# Altium PCB RF-UNIT.PcbDoc (part 2 of 3)
Units mm, origin at the board's own origin, x right, y up, seen from the top; angles counter-clockwise.
Board outline 187 x 77 mm, 2 copper layers (Top Layer, Top, Bottom Layer, Bottom); 286 components, 158 nets, 740 pads, 1203 vias.
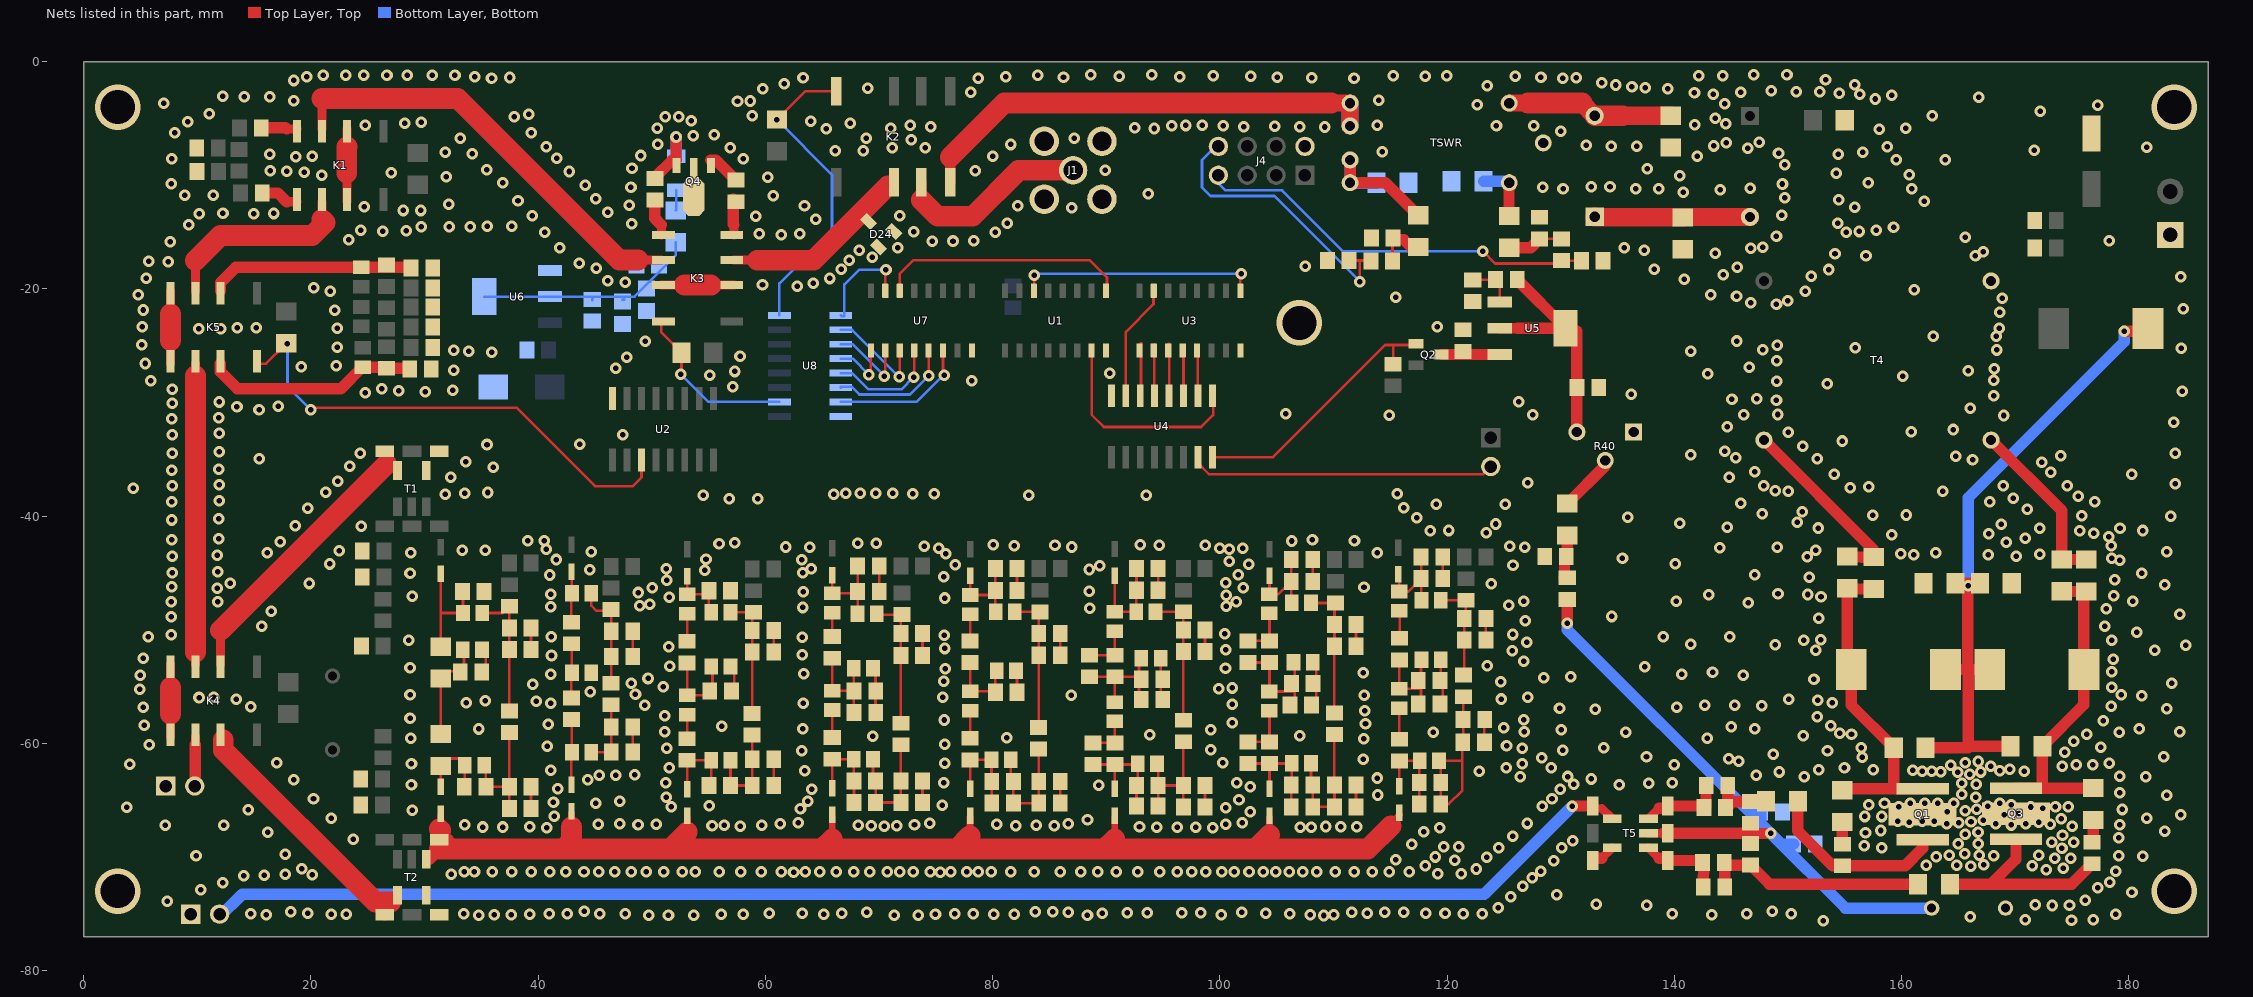
[diagram p2: the nets of this part, all layers, seen from the top]

## Via types
v1: diameter 1.016, hole 0.486, Top Layer, Top to Bottom Layer, Bottom, tented both sides, 1198 vias
v2: diameter 4, hole 3, Top Layer, Top to Bottom Layer, Bottom, 5 vias

## Nets (pads, with @x,y where several pads share a name; then routed paths per layer and width w, separated by ;. In a path a pad name is that pad's centre, name@x,y a point inside that pad or via, vN(x,y) a via of type N, cw(c..) or ccw(c..) an arc to the next point about the centre after c; other vN are vias at no path point) (continued)
GND: C1.1 C2.1 C3.1 C4.1 C7.1 C8.1 C9.1 C10.1 C13.1 C14.1 C16.1 C17.1 C18.1 C19.1 C22.1 C23.1 C25.1 C26.1 C28.1 C29.1 C30.1 C31.1 C34.1 C35.1 C37.1 C40.1 C41.1 C42.1 C43.1 C46.1 C47.1 C49.1 C50.1 C54.1 C55.1 C56.1 C57.1 C60.1 C61.1 C63.1 C64.1 C68.1 C69.1 C70.1 C71.1 C74.1 C75.1 C77.1 C78.1 C82.1 C83.1 C84.1 C85.1 C88.1 C89.1 C95.2 C96.1 C97.1 C98.1 C99.1 C100.1 C104.1 C105.2 C106.1 C107.1 C108.1 C109.1 C110.1 C113.2 C114.2 C115.1 C116.2 C117.1 C118.1 C119.2 C121.1 C122.1 C123.1 C124.1 C125.1 C126.1 C127.1 C128.2 C129.2 C130.1 C133.1 D24.1 D24.2 J1.1 J1.2 J1.3 J1.4 J2.1 J4.2 J8.1 J9.1 L2.1 L5.1 L10.1 L15.1 L20.1 L25.1 L30.1 L35.1 Q1.2 Q3.2 Q4.0 Q4.2 R30.1 R31.1 R36.2 R40.1 R45.1 R51.2 R53.1 R54.1 R55.2 R56.2 T1.4 T1.11 T2.6 T2.10 T4.4 T5.6 T5.10 TSWR.7 U1.8 U2.8 U3.8 U4.8 U6.1 U7.8 U8.8 | length 65.2
  Top Layer, Top w0.23: L35.1@35.065,-51.753 35.377,-52.065 C89.1@35.377,-53.657 ; C85.1@39.37,-65.722 C84.1@39.37,-63.817 ; C83.1@39.37,-51.753 C82.1@39.37,-49.848 ; C3.1@48.327,-60.767 C4.1@48.327,-58.544 ; C2.1@48.327,-52.353 C1.1@48.327,-50.131 ; L5.1@56.933,-53.234 57.245,-53.546 C14.1@57.245,-55.139 ; C9.1@60.742,-63.711 C10.1@60.742,-61.396 ; C8.1@60.742,-51.964 C7.1@60.742,-50.059 ; L10.1@69.473,-53.406 69.693,-53.626 C26.1@69.693,-57.216 ; C22.1@70.015,-46.631 C25.1@70.015,-44.408 ; C18.1@73.825,-65.205 C19.1@73.825,-63.3 ; C17.1@73.825,-52.254 C16.1@73.825,-50.349 ; L15.1@82.056,-53.596 82.144,-53.684 C35.1@82.144,-55.501 ; C34.1@82.149,-46.53 C37.1@82.149,-44.625 ; C30.1@85.959,-65.263 C31.1@85.959,-63.358 ; C29.1@85.959,-52.245 C28.1@85.959,-50.34 ; C46.1@94.564,-46.525 C49.1@94.564,-44.62 ; C50.1@94.784,-56.327 94.784,-52.522 L20.1@94.789,-52.517 ; C42.1@98.691,-65.616 C43.1@98.691,-63.711 ; C41.1@98.691,-51.923 C40.1@98.691,-50.018 ; L25.1@108.177,-52.88 108.49,-53.193 108.49,-54.785 C64.1@108.49,-56.69 ; C60.1@108.177,-45.736 C63.1@108.177,-43.831 ; C56.1@111.987,-65.58 C57.1@111.987,-63.675 ; C55.1@111.987,-51.451 C54.1@111.987,-49.546 ; L30.1@119.45,-52.651 119.45,-54.402 119.604,-54.556 C78.1@119.604,-56.461 ; C74.1@119.609,-45.507 C77.1@119.609,-43.602 ; C70.1@123.283,-59.901 123.283,-57.906 C71.1@123.305,-57.906 ; C69.1@123.419,-50.905 C68.1@123.419,-49
  Top Layer, Top w0.76: 133.6,-70.122 T5.10@134.537,-69.185
  Top Layer, Top w1: T5.6@132.826,-70.315 133.02,-70.122 133.6,-70.122
  other v1: 153.12,-75.621 174.955,-75.554 170.892,-75.538 176.856,-75.504 166.035,-75.263 109.124,-75.15 34.794,-75.134 49.718,-75.11 51.473,-75.11 53.707,-75.11 71.342,-75.11 73.456,-75.11 88.35,-75.113 36.15,-75.091 16.084,-75.07 37.627,-75.072 100.131,-75.066 107.967,-75.07 110.031,-75.075 143.299,-75.081 178.853,-75.038 21.79,-75.03 23.106,-75.03 39.265,-75.03 56.101,-75.03 58.056,-75.03 65.158,-75.03 74.972,-75.03 80.119,-75.03 81.914,-75.03 150.278,-75.015 14.719,-74.998 33.443,-74.996 40.98,-74.991 42.576,-74.991 45.409,-74.991 47.683,-74.991 76.648,-74.991 78.284,-74.991 106.132,-74.991 121.413,-74.991 123.082,-74.99 139.828,-74.987 146.366,-74.976 19.715,-74.951 60.33,-74.951 63.243,-74.951 66.714,-74.951 89.654,-74.951 104.057,-74.951 112.954,-74.951 118.141,-74.951 119.817,-74.951 91.849,-74.911 93.604,-74.911 96.636,-74.911 98.312,-74.911 68.908,-74.871 86.662,-74.871 101.943,-74.871 111.598,-74.871 114.51,-74.871 116.186,-74.871 18.239,-74.831 83.75,-74.831 85.306,-74.831 44.052,-74.791 148.605,-74.759 124.51,-74.481 137.582,-74.266 173.255,-74.27 174.779,-74.233 171.768,-74.197 133.121,-74.163 7.366,-73.914 176.157,-73.798 125.614,-73.48 129.648,-73.315 180.279,-73.096 10.287,-72.898 177.281,-72.71 126.639,-72.557 12.254,-72.278 178.333,-72.239 127.477,-71.839 14.09,-71.639 15.885,-71.599 20.114,-71.559 17.76,-71.519 32.342,-71.527 119.164,-71.486 121.244,-71.478 62.477,-71.363 75.411,-71.352 33.498,-71.3 34.399,-71.3 35.953,-71.3 37.687,-71.3 39.398,-71.3 41.042,-71.3 42.438,-71.3 44.037,-71.3 45.343,-71.3 46.762,-71.3 48.181,-71.3 49.532,-71.3 51.041,-71.3 52.685,-71.3 53.811,-71.3 55.928,-71.3 57.842,-71.3 59.644,-71.3 61.378,-71.3 63.495,-71.3 64.778,-71.3 66.22,-71.3 67.773,-71.3 69.192,-71.3 70.724,-71.3 71.827,-71.3 72.998,-71.3 74.507,-71.3 76.331,-71.3 77.727,-71.3 78.741,-71.3 79.867,-71.3 81.578,-71.3 83.65,-71.3 85.947,-71.3 87.749,-71.3 89.257,-71.3 90.901,-71.3 92.771,-71.3 94.73,-71.3 96.261,-71.3 97.522,-71.3 98.761,-71.3 100.157,-71.3 101.261,-71.3 102.567,-71.3 103.805,-71.3 104.909,-71.3 106.103,-71.3 107.296,-71.3 108.512,-71.3 110.156,-71.3 111.823,-71.3 113.399,-71.3 114.908,-71.3 116.687,-71.3 178.841,-71.259 128.235,-71.24 172.72,-71.12 19.178,-71.05 122.576,-71.057 174.244,-70.993 166.074,-70.824 118.061,-70.787 171.514,-70.751 162.179,-70.739 164.846,-70.739 167.235,-70.679 129.392,-70.323 120.671,-70.283 115.494,-70.245 173.482,-70.104 174.879,-70.104 118.961,-69.999 123.487,-70.003 163.068,-69.977 181.242,-69.916 168.105,-69.881 179.095,-69.881 9.89,-69.873 164.211,-69.85 166.836,-69.845 172.085,-69.85 17.742,-69.74 165.566,-69.7 124.564,-69.205 130.11,-69.205 158.239,-69.192 174.117,-69.215 119.705,-69.098 121.011,-69.098 156.716,-69.011 116.888,-68.885 164.973,-68.834 166.751,-68.834 173.228,-68.707 175.133,-68.707 131.068,-68.567 23.725,-68.43 179.131,-68.321 125.761,-68.168 174.162,-68.067 165.602,-67.995 156.825,-67.886 16.213,-67.811 117.945,-67.797 166.727,-67.814 183.147,-67.73 158.167,-67.669 40.767,-67.437 99.358,-67.423 119.344,-67.432 94.453,-67.396 97.887,-67.396 96.264,-67.381 107.083,-67.381 108.054,-67.378 35.127,-67.362 36.871,-67.362 92.927,-67.341 110.656,-67.351 112.042,-67.342 39.274,-67.325 109.327,-67.317 57.787,-67.301 70.482,-67.288 175.006,-67.31 85.415,-67.265 55.305,-67.236 82.036,-67.237 56.397,-67.219 59.694,-67.219 69.31,-67.234 71.572,-67.234 7.198,-67.196 12.34,-67.207 68.165,-67.207 83.835,-67.21 73.125,-67.179 169.672,-67.183 179.204,-67.161 33.546,-67.158 48.791,-67.159 45.274,-67.13 50.412,-67.128 100.5,-67.119 173.074,-67.124 80.347,-67.101 47.204,-67.079 86.669,-67.074 61.329,-67.055 74.487,-67.043 127.038,-67.051 163.957,-67.056 168.275,-67.056 170.942,-67.056 62.888,-66.993 101.968,-66.978 165.022,-66.979 160.67,-66.943 166.11,-66.907 172.085,-66.929 162.882,-66.871 159.654,-66.834 161.83,-66.834 167.198,-66.762 88.352,-66.707 174.053,-66.653 21.786,-66.596 181.568,-66.589 156.752,-66.435 158.239,-66.435 41.402,-66.421 169.037,-66.294 184.552,-66.282 170.307,-66.167 102.683,-66.036 164.039,-66.015 28.918,-65.892 165.608,-65.913 14.472,-65.835 179.421,-65.819 166.624,-65.786 63.091,-65.753 172.421,-65.71 100.503,-65.666 3.786,-65.611 171.369,-65.601 51.736,-65.56 159.763,-65.565 173.546,-65.565 174.67,-65.565 128.355,-65.535 167.597,-65.528 55.062,-65.475 75.582,-65.457 157.099,-65.405 169.672,-65.405 45.078,-65.257 158.496,-65.278 160.782,-65.278 162.052,-65.278 163.195,-65.278 164.592,-65.278 168.656,-65.278 41.351,-65.174 47.179,-65.112 63.712,-65.087 101.686,-64.97 20.231,-64.86 129.232,-64.857 51.277,-64.754 166.545,-64.731 183.347,-64.578 113.879,-64.544 165.276,-64.477 179.204,-64.332 64.072,-64.036 129.95,-64.019 41.721,-63.983 102.655,-63.804 89.33,-63.69 28.853,-63.644 135.135,-63.642 166.582,-63.606 131.147,-63.58 137.747,-63.497 165.276,-63.497 101.482,-63.476 139.814,-63.461 51.222,-63.446 75.714,-63.448 18.48,-63.209 44.38,-63.207 132.669,-63.135 113.855,-63.05 151.42,-62.953 181.48,-62.946 126.438,-62.928 130.601,-62.917 179.204,-62.881 45.371,-62.825 46.834,-62.825 147.213,-62.808 48.501,-62.757 166.001,-62.699 164.949,-62.554 149.244,-62.518 166.981,-62.518 163.462,-62.482 122.816,-62.455 161.83,-62.446 162.664,-62.446 170.789,-62.446 63.472,-62.428 168.649,-62.409 160.996,-62.373 41.122,-62.348 152.726,-62.337 157.514,-62.337 169.52,-62.264 51.534,-62.166 125.206,-62.166 129.151,-62.155 154.975,-62.155 167.851,-62.01 174.126,-62.01 164.333,-61.938 139.995,-61.901 176.81,-61.901 175.359,-61.865 4.064,-61.849 28.853,-61.78 126.618,-61.779 75.768,-61.758 178.297,-61.756 17.002,-61.71 165.608,-61.722 100.274,-61.696 145.654,-61.575 166.751,-61.595 112.601,-61.379 144.783,-61.357 128.351,-61.273 137.549,-61.192 156.535,-61.212 183.068,-61.187 148.696,-60.971 174.38,-60.777 153.48,-60.664 63.2,-60.63 130.165,-60.598 99.216,-60.561 51.316,-60.449 126.596,-60.428 156.462,-60.378 133.791,-60.366 177.53,-60.357 40.822,-60.25 125.23,-60.205 5.773,-60.114 75.795,-60.069 175.141,-59.798 112.656,-59.608 142.893,-59.551 28.789,-59.532 81.228,-59.488 69.436,-59.382 107.044,-59.344 151.329,-59.348 93.84,-59.242 155.592,-59.217 176.302,-59.181 154.54,-59.109 179.149,-59.041 118.777,-59.018 126.799,-58.987 135.719,-59.003 184.464,-58.997 51.125,-58.977 99.186,-58.792 130.045,-58.795 34.787,-58.734 180.909,-58.733 147.062,-58.717 63.309,-58.695 125,-58.614 145.007,-58.554 56.164,-58.51 153.778,-58.456 5.334,-58.398 40.876,-58.315 112.819,-58.272 101.101,-58.178 177.753,-58.021 75.741,-57.944 126.731,-57.906 28.725,-57.797 152.568,-57.674 51.153,-57.56 112.755,-57.115 133.046,-57.008 183.347,-56.958 129.894,-56.928 5.255,-56.802 140.227,-56.809 14.719,-56.79 178.442,-56.715 147.687,-56.671 49.379,-56.654 142.693,-56.639 145.327,-56.639 101.101,-56.57 41.107,-56.473 63.336,-56.461 33.664,-56.423 153.887,-56.425 39.843,-56.278 35.358,-56.247 152.618,-56.207 13.424,-56.127 124.777,-56.096 150.056,-56.1 10.155,-55.964 11.463,-55.937 75.604,-55.954 127.089,-55.947 181.129,-55.793 86.936,-55.772 112.71,-55.766 28.725,-55.741 179.337,-55.714 48.569,-55.686 44.571,-55.461 4.935,-55.246 99.902,-55.183 101.074,-55.126 178.515,-55.046 51.032,-55.026 39.525,-54.786 48.186,-54.695 183.795,-54.708 75.705,-54.54 124.703,-54.561 152.291,-54.357 49.672,-54.29 128.506,-54.221 130.868,-54.142 4.975,-54.009 146.077,-54.009 140.651,-53.935 41.094,-53.901 63.363,-53.872 112.629,-53.804 143.36,-53.723 178.515,-53.704 75.85,-53.42 100.498,-53.39 28.725,-53.363 137.401,-53.242 51.589,-53.201 123.535,-53.179 126.731,-52.771 178.623,-52.58 5.259,-52.511 41.176,-52.266 63.227,-52.21 125.745,-51.861 152.436,-51.818 182.27,-51.799 100.535,-51.779 75.768,-51.649 51.48,-51.511 184.991,-51.36 148.878,-51.333 141.454,-51.272 127.024,-51.082 151.396,-50.944 28.596,-50.922 178.478,-50.912 152.871,-50.875 63.227,-50.657 41.149,-50.631 5.67,-50.606 139.023,-50.615 144.888,-50.615 75.741,-50.483 7.723,-50.425 125.772,-50.417 100.447,-50.346 180.68,-50.209 15.689,-49.709 177.898,-49.678 126.889,-49.213 152.69,-48.989 7.722,-48.871 134.508,-48.832 184.464,-48.639 16.509,-48.376 178.007,-48.155 88.567,-48.103 63.309,-48.041 41.122,-47.988 100.563,-47.933 48.929,-47.894 125.425,-47.85 49.844,-47.756 146.504,-47.628 7.699,-47.542 101.444,-47.527 11.802,-47.522 140.18,-47.503 126.738,-47.477 180.336,-47.477 75.768,-47.207 51.534,-47.151 152.908,-47.103 28.918,-47.067 178.66,-46.994 100.563,-46.952 143.035,-46.928 151.733,-46.898 41.094,-46.871 149.124,-46.818 48.816,-46.723 63.336,-46.651 88.513,-46.605 11.777,-46.338 50.061,-46.29 102.042,-46.284 112.686,-46.257 7.766,-46.235 183.15,-46.029 123.875,-45.966 19.858,-45.928 12.905,-45.913 100.536,-45.874 51.304,-45.625 178.768,-45.616 151.892,-45.398 75.686,-45.327 41.04,-45.181 101.605,-45.178 147.08,-45.163 181.129,-45.04 7.789,-44.996 28.725,-45.011 63.281,-44.989 11.814,-44.912 54.652,-44.764 44.527,-44.729 88.513,-44.697 51.277,-44.644 64.05,-44.64 89.436,-44.354 125.801,-44.31 76.728,-44.298 21.673,-44.212 102.555,-44.216 140.1,-44.191 100.836,-43.982 179.22,-43.882 63.2,-43.844 41.585,-43.819 54.774,-43.801 135.436,-43.709 178.478,-43.694 151.709,-43.581 170.1,-43.549 7.788,-43.532 11.753,-43.454 161.069,-43.403 167.633,-43.403 172.167,-43.367 75.877,-43.311 159.944,-43.295 16.148,-43.22 28.789,-43.211 113.871,-43.218 162.991,-43.222 44.691,-43.132 183.33,-43.137 22.496,-43.032 35.339,-43.011 152.436,-43.005 33.315,-42.99 40.698,-42.921 100.826,-42.921 102.006,-42.832 75.276,-42.808 100,-42.823 144,-42.802 63.918,-42.728 126.821,-42.75 149.069,-42.729 61.776,-42.716 86.973,-42.717 73.989,-42.667 125.519,-42.644 81.907,-42.619 178.442,-42.606 85.49,-42.578 98.731,-42.573 94.678,-42.553 80.045,-42.517 92.999,-42.512 55.921,-42.45 68.15,-42.397 69.768,-42.377 57.293,-42.348 169.229,-42.315 17.286,-42.268 40.557,-42.178 106.322,-42.189 39.083,-42.157 111.85,-42.148 108.153,-42.098 7.749,-42.083 11.904,-41.981 170.898,-41.953 178.224,-41.808 159.146,-41.626 167.67,-41.554 176.919,-41.517 123.438,-41.464 175.686,-41.3 118.509,-41.273 120.162,-41.264 181.216,-41.266 172.167,-41.082 179.223,-41.062 152.654,-41.046 144.662,-40.976 24.43,-40.906 18.605,-40.85 168.757,-40.695 124.266,-40.692 140.457,-40.625 150.804,-40.538 7.745,-40.34 11.9,-40.237 117.323,-40.141 135.891,-40.103 183.71,-40.011 175.867,-39.958 157.478,-39.922 160.412,-39.901 147.723,-39.802 151.239,-39.631 171.079,-39.414 19.708,-39.292 116.188,-39.266 119.054,-38.944 125.113,-38.962 145.86,-38.876 7.762,-38.739 167.779,-38.725 177.017,-38.727 11.917,-38.637 59.34,-38.482 56.816,-38.457 169.81,-38.434 175.54,-38.253 54.544,-38.157 83.186,-38.16 93.52,-38.157 66.021,-38.091 31.826,-38.059 74.862,-38.029 72.982,-38.017 115.594,-38.023 67.082,-37.98 68.366,-37.998 69.706,-37.998 71.214,-37.998 33.558,-37.971 21.302,-37.902 35.565,-37.921 150.029,-37.818 163.631,-37.814 148.882,-37.782 4.348,-37.529 155.483,-37.491 157.091,-37.43 7.779,-37.343 168.939,-37.346 174.597,-37.346 147.866,-37.31 11.934,-37.241 184.103,-37.147 127.09,-37.079 22.354,-36.95 32.306,-36.56 144.843,-36.564 154.068,-36.331 180.251,-36.306 173.11,-36.149 147.069,-36.093 7.755,-35.968 11.91,-35.865 36.05,-35.679 23.433,-35.601 172.349,-35.243 33.624,-35.211 166.243,-35.052 15.466,-34.964 152.581,-34.953 145.4,-34.844 164.768,-34.735 174.018,-34.668 141.448,-34.617 7.792,-34.449 24.332,-34.462 184.104,-34.449 11.947,-34.347 144.457,-34.3 151.312,-33.864 35.501,-33.697 43.682,-33.661 154.794,-33.389 7.788,-32.828 47.461,-32.82 11.943,-32.726 150.042,-32.631 160.838,-32.557 164.551,-32.377 144.655,-32.132 183.939,-31.727 7.743,-31.432 11.899,-31.33 168.976,-31.144 114.924,-31.136 127.557,-31.092 146.121,-31.081 149.096,-31.055 105.785,-31.002 15.435,-30.628 166.038,-30.491 13.496,-30.385 17.128,-30.326 7.781,-30.057 11.936,-29.955 126.294,-29.935 148.99,-29.802 145.073,-29.73 147.248,-29.659 168.105,-29.403 136.214,-29.26 24.802,-29.127 30.077,-29.037 184.719,-28.999 27.739,-28.977 32.495,-28.934 7.799,-28.853 26.241,-28.779 57.11,-28.619 153.448,-28.33 149.006,-28.125 5.906,-28.103 78.167,-28.09 168.105,-28.025 160.084,-27.679 55.096,-27.611 142.943,-27.485 90.297,-27.441 57.29,-27.27 165.848,-27.212 32.565,-27.178 168.141,-27.009 46.813,-26.983 146.602,-26.884 19.141,-26.836 22.249,-26.745 5.437,-26.567 149.027,-26.32 47.814,-26.026 57.769,-25.936 35.925,-25.567 33.902,-25.473 141.464,-25.478 32.565,-25.41 168.359,-25.377 147.798,-25.368 184.628,-25.214 155.913,-25.194 22.319,-25.143 5.118,-24.931 149.063,-24.942 49.41,-24.607 145.502,-24.588 162.776,-24.164 168.323,-24.18 10.137,-23.521 12.068,-23.521 168.59,-23.474 22.329,-23.465 13.516,-23.434 15.184,-23.434 119.135,-23.333 5.144,-23.315 168.649,-22.04 22.12,-21.878 5.237,-21.859 184.798,-21.767 148.99,-21.351 146.705,-21.237 149.97,-21.061 168.867,-20.807 115.474,-20.733 145.472,-20.662 143.209,-20.536 4.798,-20.502 21.719,-20.193 151.529,-20.19 161.125,-20.095 20.252,-19.918 62.796,-19.752 59.748,-19.641 64.232,-19.512 47.673,-19.398 46.136,-19.289 140.866,-19.139 65.677,-19.085 5.495,-19.044 184.558,-18.916 152.037,-18.885 144.311,-18.74 153.572,-18.295 66.669,-18.284 138.218,-18.268 45.107,-18.187 145.524,-18.081 107.51,-18.009 43.614,-17.728 7.441,-17.617 5.716,-17.55 67.391,-17.469 69.418,-17.232 156.869,-17.101 166.505,-17.067 154.141,-16.926 143.586,-16.854 167.198,-16.745 68.274,-16.599 137.348,-16.6 146.742,-16.418 41.898,-16.372 71.649,-16.361 135.607,-16.382 147.794,-16.346 7.635,-15.841 74.696,-15.82 76.513,-15.787 78.336,-15.765 178.27,-15.774 23.346,-15.693 165.602,-15.439 148.99,-15.366 61.387,-15.229 59.48,-15.158 63.035,-15.164 40.582,-15.015 80.24,-15.011 155.12,-15.004 73.044,-14.972 156.258,-14.948 26.339,-14.935 28.413,-14.895 24.384,-14.856 157.768,-14.822 159.29,-14.589 34.01,-14.55 29.721,-14.517 32.19,-14.522 35.526,-14.484 37.67,-14.496 9.259,-14.349 48.233,-14.286 81.269,-14.212 154.395,-14.206 64.431,-13.887 59.165,-13.62 39.465,-13.579 71.843,-13.56 149.462,-13.517 10.181,-13.384 14.956,-13.376 16.748,-13.364 12.263,-13.336 46.127,-13.26 28.134,-13.1 29.66,-13.1 86.973,-12.872 155.864,-12.806 24.703,-12.781 63.445,-12.68 82.219,-12.695 48.034,-12.65 32.12,-12.542 162.003,-12.275 38.228,-12.262 154.467,-12.138 45.09,-12.063 149.716,-11.993 60.706,-11.811 11.404,-11.767 8.902,-11.743 93.683,-11.633 140.793,-11.486 144.021,-11.268 130.202,-11.195 136.622,-11.195 138.617,-11.195 160.887,-11.195 146.669,-11.159 48.173,-11.049 128.425,-11.05 132.705,-11.014 134.337,-11.014 44.133,-10.866 149.518,-10.77 7.713,-10.727 157.078,-10.675 36.871,-10.667 31.924,-10.148 60.198,-10.16 140.467,-10.035 20.965,-9.983 160.686,-9.961 154.25,-9.817 27.057,-9.789 19.409,-9.744 17.893,-9.664 42.736,-9.669 16.417,-9.584 78.462,-9.592 89.931,-9.578 35.475,-9.51 137.602,-9.418 48.263,-9.371 149.716,-9.092 159.512,-8.636 163.846,-8.632 7.737,-8.547 41.659,-8.512 58.052,-8.527 18.678,-8.353 79.995,-8.34 20.115,-8.313 142.027,-8.33 49.042,-8.262 16.377,-8.148 154.431,-8.149 34.198,-8.113 149.169,-8.043 31.844,-7.993 156.58,-7.989 114.294,-7.939 68.62,-7.863 66.147,-7.823 171.678,-7.801 146.452,-7.605 56.908,-7.587 71.174,-7.583 74.086,-7.583 181.562,-7.519 40.701,-7.475 158.75,-7.493 134.446,-7.459 136.695,-7.459 143.477,-7.423 132.233,-7.351 50.541,-7.273 81.608,-7.291 144.565,-7.133 147.467,-7.097 72.842,-6.861 87.173,-6.761 33.126,-6.748 68.891,-6.732 53.658,-6.523 55.487,-6.433 39.385,-6.278 8.01,-6.268 130.016,-6.131 158.022,-5.936 65.349,-5.908 94.243,-5.884 160.382,-5.877 50.48,-5.848 71.054,-5.868 92.507,-5.809 74.541,-5.746 109.238,-5.752 102.121,-5.727 107.035,-5.729 104.826,-5.675 95.771,-5.645 124.347,-5.649 127.623,-5.652 96.985,-5.619 100.295,-5.632 24.783,-5.6 98.469,-5.613 72.771,-5.588 113.838,-5.585 141.809,-5.573 144.529,-5.465 28.254,-5.44 67.463,-5.429 29.73,-5.32 9.149,-5.277 64.013,-5.256 53.473,-5.221 143.586,-4.993 37.909,-4.842 51.204,-4.835 52.363,-4.835 58.84,-4.781 162.704,-4.762 39.185,-4.63 11.047,-4.595 172.224,-4.348 177.256,-3.83 122.635,-3.8 144.457,-3.687 7.05,-3.672 57.546,-3.479 58.661,-3.464 18.504,-3.446 113.992,-3.391 157.695,-3.288 166.786,-3.144 14.144,-3.108 16.373,-3.108 12.261,-3.059 159.151,-2.954 156.317,-2.889 143.441,-2.853 154.504,-2.78 141.773,-2.744 78.086,-2.707 145.835,-2.708 150.731,-2.636 152.799,-2.636 148.519,-2.563 59.758,-2.367 139.439,-2.38 69.019,-2.357 137.456,-2.309 136.273,-2.226 123.533,-2.106 134.845,-2.055 155.895,-2.029 61.645,-1.928 133.595,-1.846 18.494,-1.658 153.306,-1.583 35.897,-1.472 78.746,-1.448 111.807,-1.448 130.181,-1.448 63.313,-1.402 108.091,-1.418 131.363,-1.402 37.511,-1.396 86.24,-1.358 105.033,-1.358 128.263,-1.358 19.636,-1.331 34.438,-1.331 81.144,-1.328 96.461,-1.328 91.155,-1.298 125.985,-1.298 102.725,-1.268 118.072,-1.268 99.428,-1.238 115.254,-1.238 119.96,-1.238 142.135,-1.224 144.249,-1.224 21.072,-1.2 23.067,-1.2 24.663,-1.2 26.698,-1.2 28.493,-1.2 30.687,-1.2 32.682,-1.2 83.962,-1.178 88.638,-1.149 94.003,-1.149 147.002,-1.144 149.914,-1.144
  other v2: 3,-73 184,-73 107,-23 3,-4 184,-4
LNA_RELAY: D26.2 K3.8 U8.10 | length 15.1
  Top Layer, Top w0.23: K3.8@50.844,-22.864 50.844,-23.831 D26.2@52.621,-25.607 52.621,-27.466 v1(52.571,-27.516)
  Bottom Layer, Bottom w0.23: v1(52.571,-27.516) 55.004,-29.949 U8.10@61.236,-29.949
LPF_OFF: D21.2 K5.8 U2.11 | length 44.8
  Top Layer, Top w0.23: K5.8@15.237,-26.574 16.056,-26.574 D21.2@17.843,-24.787 17.786,-24.731 17.786,-24.608 17.844,-24.666 17.844,-24.81 v1(17.937,-24.81) ; v1@19.724,-30.46 v1@19.976,-30.46 ; v1(19.976,-30.625) v1@19.976,-30.46 ; U2.11@49.095,-35.051 49.095,-36.594 48.329,-37.361 45.007,-37.361 38.106,-30.46 v1@19.976,-30.46
  Bottom Layer, Bottom w0.23: v1(17.937,-24.81) 17.937,-28.587 v1(19.976,-30.625)
NetC60_2: C60.2 C63.2 D12.1 L24.2 L27.1 | length 8.1
  Top Layer, Top w0.23: D12.1@104.367,-44.943 L27.1@104.367,-46.863 105.151,-46.863 C60.2@106.277,-45.736 ; C63.2@106.277,-43.831 C60.2@106.277,-45.736 ; L24.2@106.318,-47.641 106.277,-47.6 C60.2@106.277,-45.736
NetC74_2: C74.2 C77.2 D14.1 L29.2 L32.1 | length 8.1
  Top Layer, Top w0.23: D14.1@115.799,-44.714 L32.1@115.799,-46.633 116.583,-46.633 C74.2@117.709,-45.507 ; C77.2@117.709,-43.602 C74.2@117.709,-45.507 ; L29.2@117.75,-47.412 117.709,-47.371 C74.2@117.709,-45.507
NetC101_2: C101.2 C104.2 K5.2 L40.1 | length 18
  Top Layer, Top w1: K5.2@12.047,-20.174 12.047,-19.453 13.403,-18.098 L40.1@24.447,-18.098 26.665,-18.098 26.668,-18.1 28.497,-18.1 C104.2@28.677,-18.28
NetC120_1: C120.1 K3.5 | length 3.4
  Top Layer, Top w0.8: K3.5@50.844,-15.264 50.844,-14.364
  Top Layer, Top w1: C120.1@50.271,-12.099 50.271,-13.791 50.844,-14.364
NetC120_2: C120.2 L46.2 Q4.3 | length 6.3
  Top Layer, Top w1: C120.2@50.271,-10.199 51.815,-8.655 52.172,-8.655 52.135,-8.619 v1(52.135,-6.633)
  Bottom Layer, Bottom w1: v1(52.135,-6.633) 52.157,-6.655 L46.2@52.157,-8.322
NetC121_2: C121.2 C122.2 C127.2 C133.2 R39.1 U6.2 U6.4 | length 20.3
  Bottom Layer, Bottom w0.23: U6.4@35.246,-20.68 C133.2@44.86,-20.68 ; C133.2@44.751,-20.981 44.751,-20.946 C133.2@44.765,-20.932 C133.2@44.86,-20.68 ; C121.2@47.416,-20.957 47.586,-20.957 C121.2@47.586,-20.68 ; C122.2@49.842,-19.363 C122.2@49.842,-19.324 ; C127.2@51.216,-17.943 C127.2@51.222,-17.943 ; R39.1@52.111,-15.892 52.111,-17.054 C127.2@51.222,-17.943 ; C133.2@44.86,-20.68 C121.2@47.586,-20.68 ; C121.2@47.586,-20.68 48.485,-20.68 C122.2@49.842,-19.324 ; C122.2@49.842,-19.324 C127.2@51.222,-17.943
NetC124_2: C124.2 L44.2 L45.1 | length 21.5
  Top Layer, Top w1.6: C124.2@140.74,-13.711 132.988,-13.711 L45.1@132.988,-13.659 L44.2@146.654,-13.665
NetFAN_OUT_2: FAN_OUT.2 U4.15 | length 27
  Top Layer, Top w0.23: U4.15@98.07,-34.808 98.07,-35.346 99.023,-36.299 123.18,-36.299 FAN_OUT.2@123.843,-35.635
NetK1_2: K1.2 K1.7 | length 6.4
  Top Layer, Top w0.8: K1.7@23.165,-12.328 23.165,-9.806 ; 23.175,-7.486 K1.2@23.175,-5.928
  Top Layer, Top w1.83: 23.165,-9.806 23.165,-7.496 23.175,-7.486
NetK1_4: K1.4 R27.1 | length 3.2
  Top Layer, Top w0.8: 17.875,-5.928 K1.4@18.775,-5.928
  Top Layer, Top w1: R27.1@15.627,-5.822 17.768,-5.822 17.875,-5.928
NetK3_2: K3.2 K3.7 | length 6.4
  Top Layer, Top w0.8: K3.7@50.844,-19.664 52.884,-19.664 ; 55.204,-19.674 K3.2@57.244,-19.674
  Top Layer, Top w1.83: 52.884,-19.664 55.194,-19.664 55.204,-19.674
NetK4_2: K4.2 T1.6 T1.10 | length 23.7
  Top Layer, Top w0.8: K4.2@12.042,-53.052 12.042,-50.052
  Top Layer, Top w1.83: 12.042,-50.052 26.666,-35.429
NetK4_4: K4.4 K4.5 | length 6.4
  Top Layer, Top w0.8: K4.5@7.632,-59.452 7.632,-57.412 ; 7.642,-55.092 K4.4@7.642,-53.052
  Top Layer, Top w1.83: 7.632,-57.412 7.632,-55.102 7.642,-55.092
NetK5_4: K5.4 K5.5 | length 6.4
  Top Layer, Top w0.8: K5.5@7.637,-26.574 7.637,-24.534 ; 7.647,-22.214 K5.4@7.647,-20.174
  Top Layer, Top w1.83: 7.637,-24.534 7.637,-22.224 7.647,-22.214
NetL46_1: L46.1 R39.2 | length 1.8
  Bottom Layer, Bottom w0.23: R39.2@52.111,-13.092 52.157,-13.045 L46.1@52.157,-11.322
NetU1_7: U1.7 U4.1 | length 18.9
  Top Layer, Top w0.23: U1.7@88.713,-25.493 88.713,-31.078 89.793,-32.158 98.351,-32.158 99.404,-31.105 99.404,-29.472 U4.1@99.34,-29.408
NetU1_9: U1.9 U7.14 | length 22
  Top Layer, Top w0.23: U7.14@71.828,-20.093 71.828,-18.662 73.017,-17.473 88.547,-17.473 90.063,-18.99 90.063,-20.093 U1.9@89.983,-20.093
NetU1_14: U1.14 U3.9 | length 21
  Top Layer, Top w0.23: U1.14@83.633,-20.093 83.672,-20.054 v1(83.672,-18.811) ; U3.9@101.807,-20.093 101.807,-18.738 v1(101.868,-18.676)
  Bottom Layer, Bottom w0.23: v1(83.672,-18.811) 83.807,-18.676 v1(101.868,-18.676)
NetU3_1: U3.1 U4.6 | length 5.5
  Top Layer, Top w0.23: U3.1@92.917,-25.493 92.917,-24.924 93.055,-24.786 93.055,-29.408 U4.6@92.99,-29.408
NetU3_2: U3.2 U4.5 | length 5.2
  Top Layer, Top w0.23: U3.2@94.187,-25.493 94.187,-24.9 94.242,-24.9 94.242,-29.391 U4.5@94.26,-29.408
NetU3_3: U3.3 U4.4 | length 5.4
  Top Layer, Top w0.23: U3.3@95.457,-25.493 95.457,-24.823 95.561,-24.823 95.561,-29.377 U4.4@95.53,-29.408
NetU3_4: U3.4 U4.3 | length 5
  Top Layer, Top w0.23: U3.4@96.727,-25.493 96.727,-24.976 96.8,-24.976 U4.3@96.8,-29.408
NetU3_5: U3.5 U4.2 | length 5.1
  Top Layer, Top w0.23: U3.5@97.997,-25.493 97.997,-24.95 98.07,-24.95 U4.2@98.07,-29.408
NetU3_15: U3.15 U4.7 | length 10.3
  Top Layer, Top w0.23: U4.7@91.72,-29.408 91.72,-23.782 94.162,-21.341 94.162,-20.118 U3.15@94.187,-20.093
RF_TX_IN: J9.2 T5.4 T5.11 | length 126.5
  Top Layer, Top w0.76: 133.6,-65.708 T5.11@134.537,-66.645
  Top Layer, Top w1: v1@131.04,-65.515 T5.4@132.826,-65.515 T5.4@133.02,-65.708
  Bottom Layer, Bottom w1: J9.2@11.97,-75.265 13.953,-73.281 123.273,-73.281 v1(131.02,-65.534)
RX_ATT_LPF: K1.6 K5.3 | length 17.4
  Top Layer, Top w0.8: K5.3@9.847,-20.174 9.847,-17.49 ; 20.965,-13.886 K1.6@20.965,-12.328
  Top Layer, Top w1.83: 9.847,-17.49 12.048,-15.289 20.123,-15.289 21.245,-14.166 20.965,-13.886
RX_BPF_OUT: J2.2 K4.6 | length 4.4
  Top Layer, Top w0.8: K4.6@9.832,-60.102 K4.6@9.832,-59.452
  Top Layer, Top w1: K4.6@9.832,-60.102 9.832,-63.87 J2.2@9.842,-63.881
RX_IN_LNA: D24.3 K2.2 K3.3 | length 17.4
  Top Layer, Top w0.8: K3.3@57.244,-17.474 59.284,-17.474
  Top Layer, Top w0.9: 70.771,-10.946 71.314,-10.946 K2.2@71.314,-10.614
  Top Layer, Top w1.202: 68.416,-13.301 68.641,-13.525
  Top Layer, Top w1.83: 59.284,-17.474 64.243,-17.474 68.416,-13.301 70.771,-10.946
RX_LNA_ATT: K1.3 K3.6 | length 38.4
  Top Layer, Top w0.8: K1.3@20.975,-5.928 20.975,-3.246 ; 48.789,-17.464 K3.6@50.844,-17.464
  Top Layer, Top w1.83: 20.975,-3.246 32.922,-3.246 47.14,-17.464 48.789,-17.464
RX_LPF_BPF: K4.3 K5.6 | length 26.5
  Top Layer, Top w0.8: 9.837,-27.649 K5.6@9.837,-26.574 ; K4.3@9.842,-53.052 9.842,-51.987
  Top Layer, Top w1.83: 9.837,-27.649 9.842,-27.644 9.842,-51.987
SWR_DET_BACKW: J4.8 R50.2 R54.2 | length 25.5
  Top Layer, Top w0.23: R54.2@111.377,-17.501 112.329,-17.501 ; v1(112.329,-19.36) 112.329,-17.501 ; R50.2@113.296,-17.542 113.255,-17.501 112.329,-17.501
  Bottom Layer, Bottom w0.23: J4.8@99.872,-7.457 99.636,-7.457 98.432,-8.661 98.432,-11.077 99.182,-11.827 104.796,-11.827 v1(112.329,-19.36)
SWR_DET_FORW: J4.7 R36.1 R49.2 | length 35.9
  Top Layer, Top w0.23: v1(123.14,-16.677) 124.225,-17.763 130.078,-17.763 R49.2@130.078,-17.511 130.09,-17.523 R36.1@131.823,-17.523
  Bottom Layer, Bottom w0.23: J4.7@99.872,-9.997 99.845,-10.024 99.845,-10.668 100.5,-11.323 105.475,-11.323 110.846,-16.694 123.157,-16.694 v1(123.14,-16.677)
SWR_OUT: K2.4 TSWR.2 TSWR.5 | length 43.4
  Top Layer, Top w0.9: K2.4@76.264,-10.614 76.264,-8.41
  Top Layer, Top w1.5: 109.801,-3.653 TSWR.2@111.466,-3.653 TSWR.5@111.466,-5.653
  Top Layer, Top w1.83: 76.264,-8.41 81.021,-3.653 109.801,-3.653
  Bottom Layer, Bottom w1.5: TSWR.5@111.466,-5.653 TSWR.2@111.466,-3.653
TX_LPF_OUT: C125.2 L45.2 TSWR.1 | length 14.7
  Top Layer, Top w1.5: TSWR.1@125.466,-3.653 127.131,-3.653
  Top Layer, Top w1.6: 131.872,-3.653 L45.2@132.988,-4.769 ; 135.43,-4.757 C125.2@139.689,-4.757
  Top Layer, Top w1.83: 127.131,-3.653 131.872,-3.653 ; L45.2@132.988,-4.769 135.419,-4.769 135.43,-4.757
TXAMP_ENABLE: Q2.1 R41.1 U4.16 | length 23.8
  Top Layer, Top w0.23: U4.16@99.34,-34.808 104.674,-34.808 114.54,-24.943 115.259,-24.943 ; R41.1@115.259,-26.632 115.259,-24.943 ; Q2.1@117.277,-24.82 117.154,-24.943 115.259,-24.943
TXRX_RELAY: D3.2 K2.8 U8.16 | length 27.4
  Top Layer, Top w0.23: v1(61.013,-5.105) D3.2@61.024,-5.083 63.493,-2.614 K2.8@66.234,-2.614
  Bottom Layer, Bottom w0.23: v1(61.013,-5.105) 65.866,-9.958 65.866,-14.883 61.236,-19.514 U8.16@61.236,-22.329
"Сеть 10": C103.1 C110.2 K5.7 L42.2 | length 18.9
  Top Layer, Top w1: K5.7@12.037,-26.574 12.037,-27.293 13.53,-28.786 22.649,-28.786 L42.2@24.55,-26.885 26.568,-26.885 26.67,-26.987 28.33,-26.987 C110.2@28.744,-26.987
"Сеть 20": D22.2 R55.1 TSWR.4 TSWR.6 | length 13.5
  Top Layer, Top w1: TSWR.6@111.466,-8.653 TSWR.4@111.466,-10.653 114.579,-10.653 D22.2@117.452,-13.525
  Bottom Layer, Bottom w1: TSWR.6@111.466,-8.653 TSWR.4@111.466,-10.653 111.538,-10.725 R55.1@113.762,-10.725
"Сеть 21": Q3.3 R38.2 R46.1 | length 21.7
  Top Layer, Top w1: Q3.3@170.076,-68.453 170.076,-70.189 167.88,-72.385 R38.2@164.257,-72.385 174.978,-72.385 R46.1@176.765,-70.599
"Сеть 22": D23.2 R40.2 | length 5.2
  Top Layer, Top w1: D23.2@130.592,-38.898 133.921,-35.569 R40.2@133.921,-35.094
"Сеть 23": Q1.3 R32.1 R34.2 | length 16.3
  Top Layer, Top w1: R34.2@150.877,-65.084 150.877,-67.717 153.93,-70.771 R32.1@154.796,-70.771 160.317,-70.771 161.852,-69.237 Q1.3@161.852,-68.493
"Сеть 24": C111.1 R32.2 | length 1.9
  Top Layer, Top w1: C111.1@154.778,-66.932 154.778,-68.853 R32.2@154.796,-68.871
"Сеть 26": C91.1 C92.1 C111.2 L37.1 Q1.1 R48.2 | length 28.8
  Top Layer, Top w1: C111.2@154.778,-64.132 154.918,-63.993 159.306,-63.993 ; C92.1@157.533,-46.408 155.28,-46.408 C91.1@155.219,-46.346 155.219,-53.152 L37.1@155.562,-53.496 155.562,-56.627 R48.2@159.306,-60.371 159.306,-63.993 ; Q1.1@161.852,-63.993 159.306,-63.993
"Сеть 27": D23.1 R44.1 R45.2 | length 3.7
  Top Layer, Top w1: R44.1@130.321,-45.433 130.334,-45.421 R45.2@130.334,-43.522 ; R45.2@130.588,-43.522 130.588,-41.702 D23.1@130.592,-41.698
"Сеть 31": C128.1 R40.3 R52.1 U5.2 U5.4 | length 21.8
  Top Layer, Top w0.95: U5.2@124.624,-23.463 126.199,-23.463
  Top Layer, Top w1: 126.199,-23.463 U5.4@130.424,-23.463 ; R52.1@126.212,-19.239 130.424,-23.451 U5.4@130.424,-23.463 ; R40.3@131.421,-32.595 C128.1@131.421,-28.674 ; C128.1@131.443,-28.674 C128.1@131.421,-28.674 ; U5.4@130.424,-23.463 130.67,-23.709 131.421,-23.709 C128.1@131.421,-28.674
"Сеть 33": D19.2 R56.1 TSWR.3 | length 5.2
  Top Layer, Top w1: D19.2@125.452,-13.577 125.452,-10.653 TSWR.3@125.466,-10.653
  Bottom Layer, Bottom w1: R56.1@123.227,-10.525 125.339,-10.525 TSWR.3@125.466,-10.653
"Сеть 34": C93.2 C94.2 T4.3 | length 15.2
  Top Layer, Top w1: T4.3@167.881,-33.302 174.108,-39.529 C94.2@174.108,-43.813 176.241,-43.813 C93.2@176.257,-43.829
"Сеть 35": C113.1 D19.1 R49.1 | length 4.9
  Top Layer, Top w0.23: C113.1@128.132,-15.604 130.071,-15.604 R49.1@130.078,-15.611
  Top Layer, Top w1: D19.1@125.452,-16.377 127.359,-16.377 C113.1@128.132,-15.604
"Сеть 42": C112.2 K3.4 | length 3.2
  Top Layer, Top w0.8: K3.4@57.244,-15.274 57.244,-14.374
  Top Layer, Top w1: C112.2@57.173,-12.099 57.173,-12.326 57.173,-14.303 57.244,-14.374
"Сеть 43": U7.1 U8.4 | length 5.2
  Top Layer, Top w0.23: v1(69.117,-27.562) 69.288,-27.39 U7.1@69.288,-25.493
  Bottom Layer, Bottom w0.23: U8.4@66.636,-26.139 67.694,-26.139 v1(69.117,-27.562)
"Сеть 44": C112.1 Q4.1 | length 2.6
  Top Layer, Top w1: Q4.1@55.172,-8.655 55.63,-8.655 C112.1@57.173,-10.199
"Сеть 46": K4.7 T2.4 T2.11 | length 23.7
  Top Layer, Top w0.76: 26.686,-74.313 27.031,-73.968 T2.11@27.622,-73.376
  Top Layer, Top w0.8: K4.7@12.032,-59.452 K4.7@12.287,-59.708
  Top Layer, Top w1: T2.4@26.492,-75.086 26.686,-74.893 26.686,-74.313
  Top Layer, Top w1.83: K4.7@12.287,-59.708 12.287,-60.579 25.676,-73.968 27.031,-73.968
"Сеть 47": U7.3 U8.2 | length 9.1
  Top Layer, Top w0.23: v1(71.764,-27.735) 71.828,-27.671 U7.3@71.828,-25.493
  Bottom Layer, Bottom w0.23: U8.2@66.636,-23.599 67.628,-23.599 v1(71.764,-27.735)
"Сеть 84": C1.2 C2.2 L1.1 R1.2 R2.1 | length 9.5
  Top Layer, Top w0.23: L1.1@44.675,-46.797 44.675,-47.871 45.135,-48.331 46.311,-48.331 R1.2@46.422,-48.221 46.427,-48.226 C1.2@46.427,-50.131 C2.2@46.427,-52.353 46.422,-52.358 R2.1@46.422,-54.708
"Сеть 85": C3.2 C4.2 L3.1 R2.2 | length 5.9
  Top Layer, Top w0.23: L3.1@44.675,-60.767 C3.2@46.427,-60.767 C4.2@46.427,-58.544 46.427,-56.613 R2.2@46.422,-56.608
"Сеть 88": C5.2 D1.1 L1.2 | length 4.8
  Top Layer, Top w0.23: C5.2@42.929,-49.342 42.929,-46.843 L1.2@42.975,-46.797 42.975,-44.621 D1.1@42.929,-44.575
"Сеть 89": C5.1 C6.2 L2.2 | length 4.8
  Top Layer, Top w0.23: C6.2@42.929,-56.009 42.929,-53.828 L2.2@42.975,-53.782 42.975,-51.288 C5.1@42.929,-51.242
"Сеть 90": C6.1 D2.1 L3.2 | length 6.1
  Top Layer, Top w0.23: D2.1@42.929,-63.942 42.929,-60.813 L3.2@42.975,-60.767 42.975,-57.956 C6.1@42.929,-57.909
"Сеть 91": C11.2 L7.2 | length 2.4
  Top Layer, Top w0.23: C11.2@53.122,-51.016 L7.2@53.122,-48.584
"Сеть 92": C12.2 L8.2 | length 2.1
  Top Layer, Top w0.23: C12.2@53.122,-59.589 L8.2@53.122,-57.474
"Сеть 93": C7.2 C8.2 L4.1 R3.2 R4.1 | length 11
  Top Layer, Top w0.23: L4.1@56.933,-48.471 56.938,-48.466 R3.2@58.965,-48.466 58.843,-48.588 C7.2@58.843,-50.059 C8.2@58.843,-51.964 58.837,-51.969 R4.1@58.837,-57.361
"Сеть 94": C9.2 C10.2 C15.1 L6.1 R4.2 | length 8.6
  Top Layer, Top w0.23: L6.1@56.933,-61.489 C15.1@56.932,-63.711 C9.2@58.843,-63.711 C10.2@58.843,-61.396 58.843,-59.266 R4.2@58.837,-59.261
"Сеть 95": C12.1 C15.2 D5.1 L6.2 | length 7.3
  Top Layer, Top w0.23: D5.1@53.122,-64.346 C12.1@53.122,-61.489 L6.2@55.233,-61.489 55.233,-63.511 C15.2@55.033,-63.711
"Сеть 96": C11.1 C14.2 L5.2 L8.1 | length 7.3
  Top Layer, Top w0.23: C11.1@53.122,-52.916 L8.1@53.122,-55.774 54.71,-55.774 55.345,-55.139 55.345,-53.346 L5.2@55.233,-53.234
"Сеть 101": C22.2 C25.2 D6.1 L9.2 L12.1 | length 8.4
  Top Layer, Top w0.23: D6.1@65.888,-44.885 L12.1@65.888,-46.79 67.957,-46.79 C22.2@68.115,-46.631 ; L9.2@68.11,-48.581 68.115,-48.576 C22.2@68.115,-46.631 ; C25.2@68.115,-44.408 C22.2@68.115,-46.631
"Сеть 102": C16.2 C17.2 L9.1 R5.2 R6.1 | length 11.9
  Top Layer, Top w0.23: L9.1@69.81,-48.581 69.893,-48.664 R5.2@72.036,-48.664 71.925,-48.774 C16.2@71.925,-50.349 C17.2@71.925,-52.254 71.92,-52.259 R6.1@71.92,-58.22
"Сеть 103": C18.2 C19.2 C24.1 C27.1 L11.1 R6.2 | length 11.2
  Top Layer, Top w0.23: L11.1@69.473,-61.395 69.473,-63.075 C24.1@69.698,-63.3 C27.1@69.698,-65.205 C18.2@71.925,-65.205 C19.2@71.925,-63.3 71.925,-60.125 R6.2@71.92,-60.12
"Сеть 104": C20.2 L12.2 | length 2.1
  Top Layer, Top w0.23: C20.2@65.888,-50.605 L12.2@65.888,-48.49
"Сеть 105": C20.1 C23.2 C26.2 L10.2 L13.1 | length 8.6
  Top Layer, Top w0.23: C20.1@65.888,-52.505 L13.1@65.888,-55.362 67.741,-55.362 C23.2@67.793,-55.311 ; L10.2@67.773,-53.406 67.793,-53.426 C23.2@67.793,-55.311 ; C26.2@67.793,-57.216 C23.2@67.793,-55.311
"Сеть 106": C21.1 C24.2 C27.2 D7.1 L11.2 | length 8.6
  Top Layer, Top w0.23: D7.1@65.888,-64.252 C21.1@65.888,-61.395 L11.2@67.773,-61.395 67.773,-63.275 C24.2@67.798,-63.3 C27.2@67.798,-65.205
"Сеть 107": C21.2 L13.2 | length 2.4
  Top Layer, Top w0.23: C21.2@65.888,-59.495 L13.2@65.888,-57.062
"Сеть 108": U7.2 U8.3 | length 7.2
  Top Layer, Top w0.23: v1(70.479,-27.685) 70.558,-27.606 U7.2@70.558,-25.493
  Bottom Layer, Bottom w0.23: U8.3@66.636,-24.869 67.663,-24.869 v1(70.479,-27.685)
"Сеть 109": C34.2 C37.2 D8.1 L14.2 L17.1 | length 8.2
  Top Layer, Top w0.23: D8.1@78.021,-44.943 L17.1@78.021,-46.94 79.839,-46.94 C34.2@80.249,-46.53 ; C37.2@80.249,-44.625 C34.2@80.249,-46.53 ; L14.2@80.264,-48.435 80.249,-48.42 C34.2@80.249,-46.53
"Сеть 110": C28.2 C29.2 L14.1 R7.2 R8.1 | length 12.4
  Top Layer, Top w0.23: L14.1@81.964,-48.435 81.969,-48.43 R7.2@84.169,-48.43 84.059,-48.541 C28.2@84.059,-50.34 C29.2@84.059,-52.245 84.054,-52.25 R8.1@84.054,-58.595
"Сеть 111": C30.2 C31.2 C36.1 C39.1 L16.1 R8.2 | length 10.9
  Top Layer, Top w0.23: L16.1@81.606,-61.453 81.606,-63.132 C36.1@81.831,-63.358 C39.1@81.831,-65.263 C30.2@84.059,-65.263 C31.2@84.059,-63.358 84.059,-60.5 R8.2@84.054,-60.495
"Сеть 112": J1.5 K2.3 | length 17.2
  Top Layer, Top w0.9: 73.724,-12.165 K2.3@73.724,-10.614
  Top Layer, Top w1.83: 73.724,-12.165 75.163,-13.604 78.248,-13.604 82.287,-9.566 87.079,-9.566 J1.5@87.086,-9.559
"Сеть 114": C32.2 L17.2 | length 2.3
  Top Layer, Top w0.23: C32.2@78.021,-50.98 L17.2@78.021,-48.64
"Сеть 116": C32.1 C35.2 L15.2 L18.1 | length 6.7
  Top Layer, Top w0.23: C32.1@78.021,-52.88 L18.1@78.021,-55.42 80.163,-55.42 C35.2@80.244,-55.501 80.244,-53.709 L15.2@80.356,-53.596
"Сеть 117": C33.1 C36.2 C39.2 D9.1 L16.2 | length 8.6
  Top Layer, Top w0.23: D9.1@78.021,-64.31 C33.1@78.021,-61.453 L16.2@79.906,-61.453 79.906,-63.332 C36.2@79.931,-63.358 C39.2@79.931,-65.263
"Сеть 118": C33.2 L18.2 | length 2.4
  Top Layer, Top w0.23: C33.2@78.021,-59.553 L18.2@78.021,-57.12
"Сеть 120": C46.2 C49.2 D10.1 L19.2 L22.1 | length 9.2
  Top Layer, Top w0.23: D10.1@90.754,-44.938 L22.1@90.754,-48.43 L19.2@92.638,-48.43 92.639,-46.55 C46.2@92.664,-46.525 C49.2@92.664,-44.62
"Сеть 121": C40.2 C41.2 L19.1 R9.2 R10.1 | length 12
  Top Layer, Top w0.23: L19.1@94.339,-48.43 94.343,-48.425 R9.2@96.786,-48.425 96.791,-48.43 C40.2@96.791,-50.018 C41.2@96.791,-51.923 96.786,-51.928 R10.1@96.786,-57.955
"Сеть 122": C42.2 C43.2 C48.1 C51.1 L21.1 R10.2 | length 11.7
  Top Layer, Top w0.23: L21.1@94.471,-61.806 94.564,-61.898 C48.1@94.564,-63.711 ; C51.1@94.564,-65.524 C48.1@94.564,-63.711 ; R10.2@96.786,-59.855 96.791,-59.86 C43.2@96.791,-63.711 ; C42.2@96.791,-65.616 C43.2@96.791,-63.711 ; C48.1@94.564,-63.711 C43.2@96.791,-63.711
"Сеть 123": K1.5 R29.2 | length 3.4
  Top Layer, Top w0.8: 17.865,-12.328 K1.5@18.765,-12.328
  Top Layer, Top w1: R29.2@15.714,-11.564 17.101,-11.564 17.865,-12.328
"Сеть 124": C117.2 D22.1 R50.1 | length 4.6
  Top Layer, Top w0.23: R50.1@115.196,-17.542 115.196,-15.573 C117.2@115.236,-15.533
  Top Layer, Top w1: C117.2@115.236,-15.533 115.236,-15.649 116.169,-15.649 116.846,-16.325 D22.1@117.452,-16.325
"Сеть 125": C44.2 C52.2 L22.2 | length 4.3
  Top Layer, Top w0.23: C52.2@88.531,-52.245 C44.2@90.754,-52.245 L22.2@90.754,-50.13
"Сеть 128": C95.1 C105.1 L37.2 L38.1 L43.1 R47.2 R48.1 | length 58.6
  Top Layer, Top w1: R48.1@162.106,-60.371 165.853,-60.371 165.853,-60.246 ; L37.2@163.862,-53.496 165.853,-53.496 ; C95.1@164.738,-45.911 164.751,-45.898 v1@165.813,-45.898 ; v1(165.853,-46.131) 165.844,-46.08 v1@165.813,-45.898 ; C105.1@166.891,-45.898 v1@165.813,-45.898 ; L38.1@167.748,-53.491 167.743,-53.496 166.068,-53.496 ; R47.2@169.592,-60.246 165.853,-60.246 ; v1(179.584,-23.716) 181.449,-23.716 L43.1@181.685,-23.481 ; v1@165.813,-45.898 165.813,-53.24 166.068,-53.496 ; 165.853,-60.246 165.853,-53.496 ; 165.853,-53.496 166.068,-53.496
  Bottom Layer, Bottom w1: v1(165.853,-46.131) 165.853,-38.394 179.584,-24.664 v1(179.584,-23.716)
"Сеть 129": C126.2 Q2.3 U5.3 | length 7
  Top Layer, Top w0.23: Q2.3@119.577,-25.77 119.843,-25.503 C126.2@121.404,-25.504 ; U5.3@124.617,-25.77 U5.3@124.624,-25.763
  Top Layer, Top w1: Q2.3@119.577,-25.77 U5.3@124.617,-25.77
"Сеть 131": C80.2 R37.1 T5.1 T5.7 | length 7.6
  Top Layer, Top w0.76: T5.7@137.716,-69.185 138.653,-70.122
  Top Layer, Top w1: 138.653,-70.122 139.233,-70.122 T5.1@139.427,-70.315 142.446,-70.315 142.596,-70.465 R37.1@142.544,-72.649
"Сеть 132": C38.2 R33.1 T5.3 T5.9 | length 7.4
  Top Layer, Top w0.76: T5.9@137.716,-66.645 138.653,-65.708
  Top Layer, Top w1: 138.653,-65.708 139.233,-65.708 T5.3@139.427,-65.515 142.727,-65.515 142.787,-65.575 142.787,-63.734 R33.1@142.799,-63.723
"Сеть 133": C80.1 R37.2 R38.1 R43.1 | length 20
  Top Layer, Top w1: R37.2@144.444,-72.649 144.444,-70.517 144.496,-70.465 144.747,-70.716 R43.1@146.7,-70.716 148.369,-72.385 R38.1@161.458,-72.385
"Сеть 134": C38.1 R33.2 R34.1 R42.2 | length 5.4
  Top Layer, Top w1: R33.2@144.699,-63.723 144.688,-63.734 144.688,-65.127 144.688,-65.575 145.135,-65.127 R42.2@146.703,-65.127 146.747,-65.084 R34.1@148.077,-65.084
"Сеть 135": C114.1 C116.1 R42.1 R43.2 R44.2 R51.1 T5.2 T5.8 | length 63.1
  Top Layer, Top w0.76: T5.8@137.716,-67.915 T5.2@139.041,-67.915
  Top Layer, Top w1: R44.2@130.575,-47.333 130.575,-49.406 v1(130.579,-49.41) ; T5.2@139.041,-67.915 T5.2@139.427,-67.915 146.7,-67.915 ; R43.2@146.7,-68.816 146.7,-67.915 ; R42.1@146.703,-67.027 146.7,-67.915 ; v1(148.484,-67.93) 146.7,-67.915
  Bottom Layer, Bottom w1: v1(130.579,-49.41) 130.579,-50.024 C114.1@147.312,-66.758 ; C116.1@150.508,-68.861 149.416,-68.861 v1(148.484,-67.93) ; R51.1@162.648,-74.5 155.052,-74.5 v1@148.483,-67.931 ; C114.1@147.312,-66.758 v1(148.484,-67.93) ; C114.1@147.312,-66.758 147.312,-66.04 147.624,-66.04 147.624,-67.072 v1@148.483,-67.931 ; v1@148.483,-67.931 v1(148.484,-67.93)
"Сеть 136": C81.1 R46.2 | length 2
  Top Layer, Top w1: R46.2@176.765,-68.699 176.866,-68.597 C81.1@176.866,-66.741
"Сеть 137": C81.2 C93.1 C94.1 L38.2 Q3.1 R47.1 | length 27.9
  Top Layer, Top w1: Q3.1@170.076,-63.953 172.392,-63.953 ; C94.1@174.108,-46.613 174.124,-46.629 C93.1@176.257,-46.629 176.048,-46.837 L38.2@176.048,-53.491 176.048,-56.589 R47.1@172.392,-60.246 172.392,-63.953 ; C81.2@176.866,-63.942 172.392,-63.953
"Сеть 139": C91.2 C92.2 T4.1 | length 16.6
  Top Layer, Top w1: T4.1@147.881,-33.302 157.533,-42.954 C92.2@157.533,-43.608 156.544,-43.608 C91.2@155.219,-43.546
"Сеть 140": R52.2 R53.2 U5.1 | length 4.1
  Top Layer, Top w0.23: R53.2@122.258,-19.207 124.279,-19.207 124.312,-19.239 124.624,-19.551 U5.1@124.624,-21.163
"Сеть 150": U7.15 U8.1 | length 9.2
  Top Layer, Top w0.23: U7.15@70.558,-20.093 70.558,-18.36 v1(70.616,-18.302)
  Bottom Layer, Bottom w0.23: U8.1@66.636,-22.329 66.721,-22.415 66.957,-22.415 66.957,-19.617 68.272,-18.302 v1(70.616,-18.302)
"Сеть 154": U7.4 U8.5 | length 9.8
  Top Layer, Top w0.23: v1(73.056,-27.76) 73.098,-27.717 U7.4@73.098,-25.493
  Bottom Layer, Bottom w0.23: U8.5@66.636,-27.409 67.637,-27.409 69.075,-28.847 71.968,-28.847 v1(73.056,-27.76)
"Сеть 155": U7.5 U8.6 | length 10.9
  Top Layer, Top w0.23: v1(74.368,-27.661) U7.5@74.368,-25.493
  Bottom Layer, Bottom w0.23: U8.6@66.636,-28.679 66.636,-28.605 67.58,-28.605 68.272,-29.297 72.732,-29.297 v1(74.368,-27.661)
"Сеть 156": U7.6 U8.7 | length 12.2
  Top Layer, Top w0.23: U7.6@75.638,-25.493 75.638,-27.505 v1(75.729,-27.596)
  Bottom Layer, Bottom w0.23: U8.7@66.636,-29.949 73.319,-29.949 75.672,-27.596 v1(75.729,-27.596)
"Сеть 166": C13.2 D4.1 L4.2 L7.1 | length 5.9
  Top Layer, Top w0.23: D4.1@53.122,-44.979 L7.1@53.122,-46.884 54.715,-46.884 C13.2@55.033,-46.566 55.033,-48.271 L4.2@55.233,-48.471
"Сеть 185": C44.1 C47.2 C50.2 C52.1 L20.2 L23.1 | length 10.6
  Top Layer, Top w0.23: C52.1@88.531,-54.145 C44.1@90.754,-54.145 ; L23.1@90.754,-56.368 C44.1@90.754,-54.145 ; C50.2@92.884,-56.327 C47.2@92.884,-54.422 ; L20.2@93.089,-52.517 92.884,-52.722 C47.2@92.884,-54.422 ; C44.1@90.754,-54.145 92.607,-54.145 C47.2@92.884,-54.422
"Сеть 195": C45.1 C48.2 C51.2 C53.1 D11.1 L21.2 | length 10.2
  Top Layer, Top w0.23: C53.1@88.849,-61.857 C45.1@90.754,-61.857 ; D11.1@90.754,-64.305 C45.1@90.754,-61.857 ; C51.2@92.664,-65.524 C48.2@92.664,-63.711 92.771,-63.603 L21.2@92.771,-61.806 92.72,-61.858 C45.1@90.754,-61.857
"Сеть 196": C45.2 C53.2 L23.2 | length 3.8
  Top Layer, Top w0.23: C53.2@88.849,-59.957 C45.2@90.754,-59.957 L23.2@90.754,-58.068
"Сеть 199": C54.2 C55.2 L24.1 R11.2 R12.1 | length 11.9
  Top Layer, Top w0.23: L24.1@108.018,-47.641 110.193,-47.641 R11.2@110.198,-47.636 110.087,-47.747 C54.2@110.087,-49.546 C55.2@110.087,-51.451 110.082,-51.456 R12.1@110.082,-57.325
"Сеть 200": C56.2 C57.2 C62.1 C65.1 L26.1 R12.2 | length 12.1
  Top Layer, Top w0.23: L26.1@108.018,-61.77 108.018,-63.516 C62.1@108.177,-63.675 C65.1@108.177,-65.58 C56.2@110.087,-65.58 C57.2@110.087,-63.675 110.082,-63.67 R12.2@110.082,-59.225
"Сеть 201": C58.2 C66.2 L27.2 | length 4.3
  Top Layer, Top w0.23: C66.2@102.462,-50.98 C58.2@104.367,-50.98 L27.2@104.367,-48.563
"Сеть 202": C58.1 C61.2 C64.2 C66.1 L25.2 L28.1 | length 11.2
  Top Layer, Top w0.23: C66.1@102.462,-52.88 C58.1@104.367,-52.88 L28.1@104.367,-55.435 C61.2@106.59,-55.435 ; L25.2@106.477,-52.88 106.59,-52.993 C61.2@106.59,-54.785 ; C64.2@106.59,-56.69 C61.2@106.59,-55.435 ; C61.2@106.59,-55.435 C61.2@106.59,-54.785 ; C61.2@106.59,-55.435 C61.2@106.59,-54.785
"Сеть 203": C59.1 C62.2 C65.2 C67.1 D13.1 L26.2 | length 10.2
  Top Layer, Top w0.23: C67.1@102.462,-61.77 C59.1@104.367,-61.77 ; D13.1@104.367,-64.31 C59.1@104.367,-61.77 ; C65.2@106.277,-65.58 C62.2@106.277,-63.675 106.318,-63.634 L26.2@106.318,-61.77 C59.1@104.367,-61.77
"Сеть 204": C59.2 C67.2 L28.2 | length 4.6
  Top Layer, Top w0.23: C67.2@102.462,-59.87 C59.2@104.367,-59.87 L28.2@104.367,-57.135
"Сеть 207": C68.2 C69.2 L29.1 R13.2 R14.1 | length 8.9
  Top Layer, Top w0.23: L29.1@119.45,-47.412 121.649,-47.412 R13.2@121.654,-47.407 121.654,-48.865 C68.2@121.519,-49 C69.2@121.519,-50.905 121.519,-53.895 R14.1@121.424,-53.99
"Сеть 208": C70.2 C71.2 C76.1 C79.1 L31.1 R14.2 | length 16.6
  Top Layer, Top w0.23: R14.2@121.424,-55.89 121.405,-55.909 C71.2@121.405,-57.906 121.405,-59.901 C70.2@121.383,-59.901 121.336,-59.901 121.336,-61.541 ; 121.336,-61.541 L31.1@119.292,-61.541 119.45,-61.7 C76.1@119.45,-63.446 C79.1@119.45,-65.351 120.125,-65.351 121.336,-64.14 121.336,-61.541
"Сеть 209": C72.2 L32.2 | length 2.4
  Top Layer, Top w0.23: L32.2@115.799,-48.333 115.822,-48.356 C72.2@115.822,-50.751
"Сеть 210": C72.1 C75.2 C78.2 L30.2 L33.1 | length 8.9
  Top Layer, Top w0.23: C72.1@115.822,-52.651 115.799,-52.673 L33.1@115.799,-55.206 C75.2@117.704,-55.206 ; C78.2@117.704,-56.461 C75.2@117.704,-55.206 ; L30.2@117.75,-52.651 117.704,-52.697 C75.2@117.704,-54.556 ; C75.2@117.704,-55.206 C75.2@117.704,-54.556 ; C75.2@117.704,-55.206 C75.2@117.704,-54.556
"Сеть 211": C73.1 C76.2 C79.2 D15.1 L31.2 | length 8.2
  Top Layer, Top w0.23: D15.1@115.799,-64.081 C73.1@115.799,-61.541 L31.2@117.591,-61.541 117.55,-61.582 C76.2@117.55,-63.446 C79.2@117.55,-65.351
"Сеть 212": C73.2 L33.2 | length 2.7
  Top Layer, Top w0.23: C73.2@115.799,-59.641 L33.2@115.799,-56.906
"Сеть 213": D2.2 D5.2 D7.2 D9.2 D11.2 D13.2 D15.2 D17.2 T2.1 T2.7 | length 113.3
  Top Layer, Top w0.6: 31.432,-67.68 D17.2@31.432,-66.335 ; 42.929,-67.357 D2.2@42.929,-66.142 ; 53.122,-67.801 D5.2@53.122,-66.546 ; 65.888,-68.399 D7.2@65.888,-66.452 ; 78.021,-68.123 D9.2@78.021,-66.51 ; 90.754,-68.39 D11.2@90.754,-66.505 ; 104.367,-68.062 D13.2@104.367,-66.51 ; 115.062,-67.262 114.94,-67.14 D15.2@115.799,-66.281
  Top Layer, Top w0.76: T2.7@30.404,-70.196 T2.7@30.162,-70.196 T2.7@30.436,-70.196
  Top Layer, Top w1: T2.7@30.404,-70.196 32.114,-68.486 T2.1@31.293,-68.486 31.293,-67.54 ; T2.7@30.436,-70.196 31.33,-69.301
  Top Layer, Top w1.83: 31.293,-67.54 31.432,-67.68 ; 31.33,-69.301 42.209,-69.301 ; 42.929,-67.357 42.929,-68.582 42.209,-69.301 ; 53.122,-67.801 51.622,-69.301 ; 65.888,-68.399 64.986,-69.301 ; 78.021,-68.123 76.842,-69.301 ; 90.754,-68.39 89.842,-69.301 ; 104.367,-68.062 103.128,-69.301 ; 115.062,-67.262 113.023,-69.301 103.128,-69.301 ; 42.209,-69.301 51.622,-69.301 ; 51.622,-69.301 64.986,-69.301 ; 64.986,-69.301 76.842,-69.301 ; 76.842,-69.301 89.842,-69.301 ; 89.842,-69.301 103.128,-69.301
"Сеть 214": C86.2 C88.2 D16.1 L34.2 | length 10.9
  Top Layer, Top w0.23: C86.2@31.432,-51.753 31.432,-48.527 ; D16.1@31.432,-44.768 31.432,-48.527 ; C88.2@33.343,-46.622 33.384,-46.663 L34.2@33.384,-48.527 31.432,-48.527
"Сеть 215": C82.2 C83.2 L34.1 R15.2 R16.1 | length 11.8
  Top Layer, Top w0.23: L34.1@35.084,-48.527 36.876,-48.527 R15.2@37.465,-47.938 37.465,-49.843 C82.2@37.47,-49.848 C83.2@37.47,-51.753 37.47,-57.145 R16.1@37.465,-57.15
"Сеть 216": C84.2 C85.2 C90.1 L36.1 R16.2 | length 10.7
  Top Layer, Top w0.23: L36.1@35.243,-61.912 35.401,-62.071 C90.1@35.401,-63.817 C84.2@37.47,-63.817 ; R16.2@37.465,-59.05 37.47,-59.055 C84.2@37.47,-63.817 ; C85.2@37.47,-65.722 C84.2@37.47,-63.817
"Сеть 218": C86.1 C87.2 C89.2 L35.2 | length 9.8
  Top Layer, Top w0.23: C87.2@31.432,-59.428 31.432,-53.653 33.472,-53.653 33.477,-53.657 33.477,-51.865 L35.2@33.365,-51.753
"Сеть 219": C87.1 C90.2 D17.1 L36.2 | length 7.4
  Top Layer, Top w0.23: D17.1@31.432,-64.135 31.432,-61.328 33.543,-61.328 L36.2@33.543,-61.912 33.543,-63.776 C90.2@33.501,-63.817